# Altium PCB PCB3.PcbDoc
Units mil, origin at the board's own origin, x right, y up, seen from the top; angles counter-clockwise.
Board outline 1122.39 x 925 mil, 4 copper layers (Top Layer, GND02, PWR03, Bottom Layer), stack 50.526 mil thick; 40 components, 55 nets, 222 pads, 139 vias.
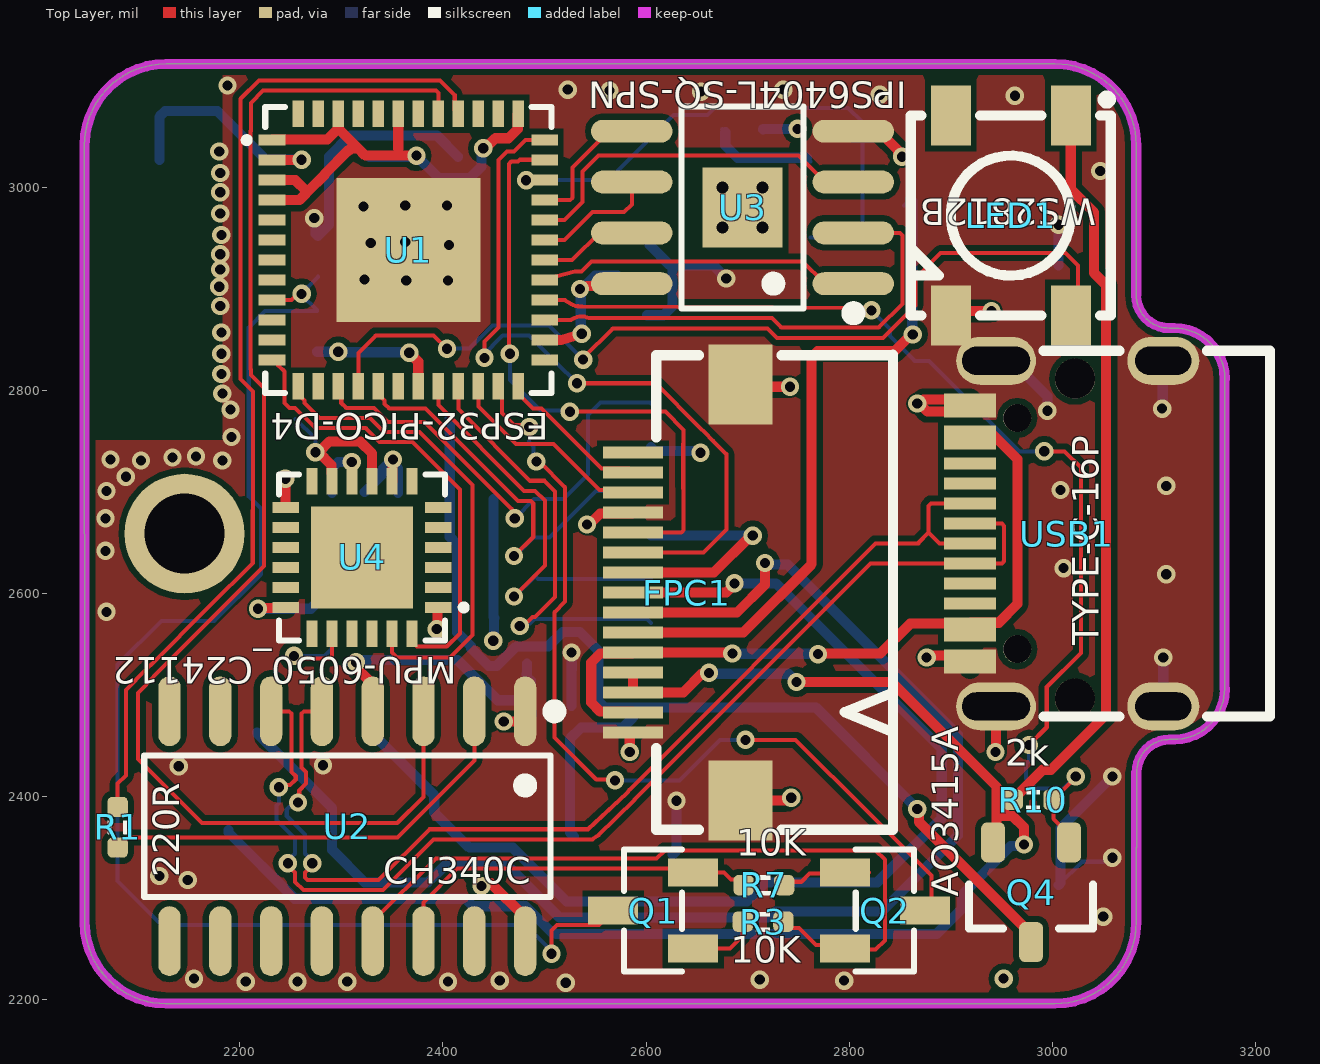
[diagram p0: Top Layer view]
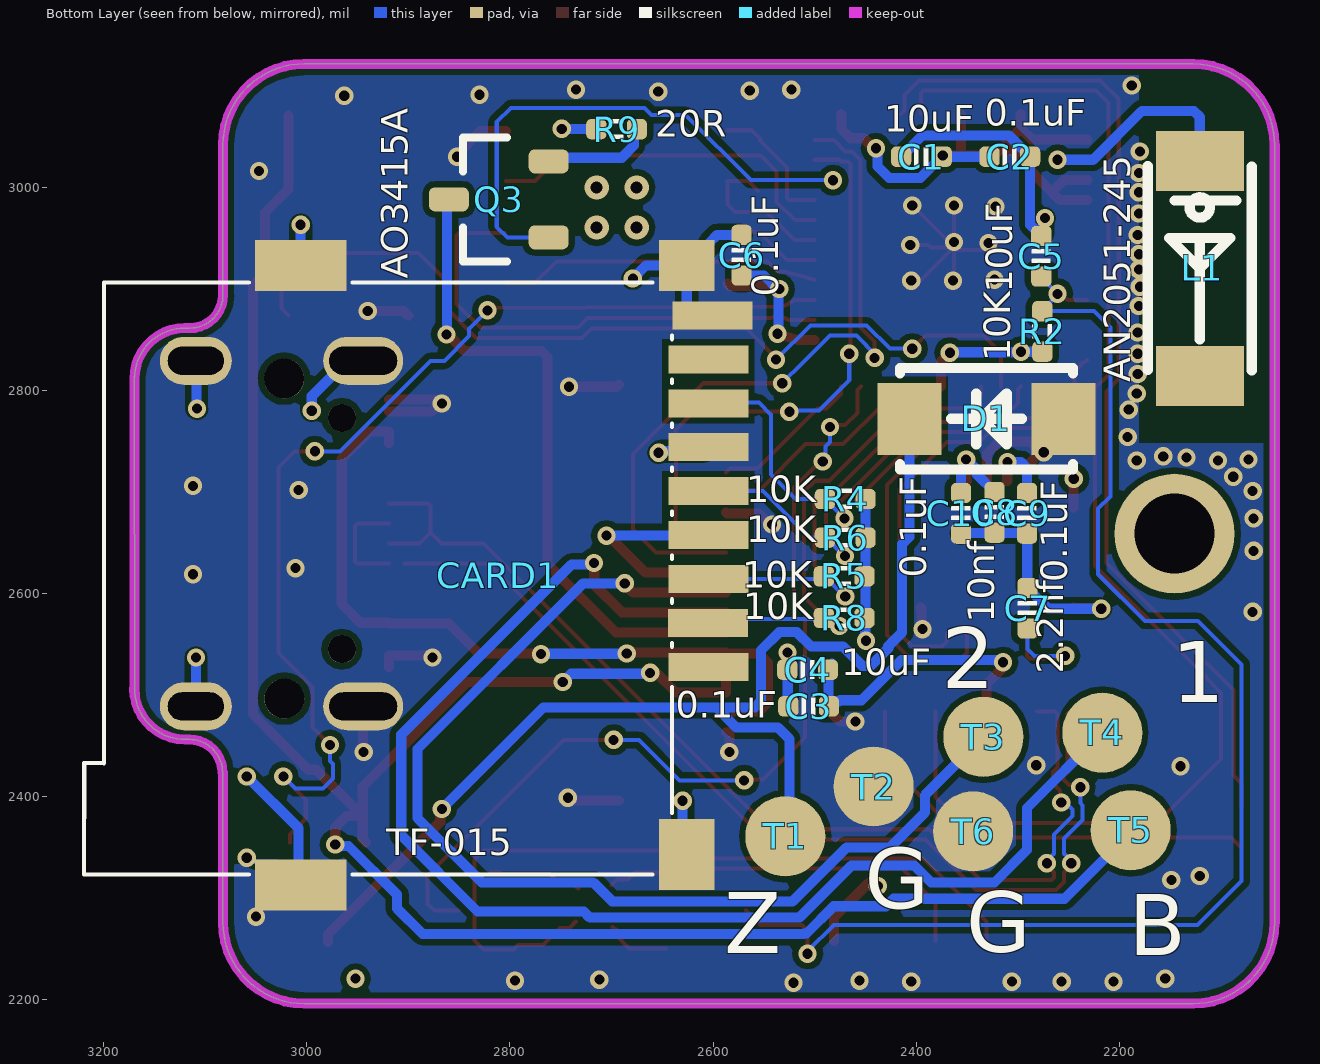
[diagram p1: Bottom Layer view, seen from below]
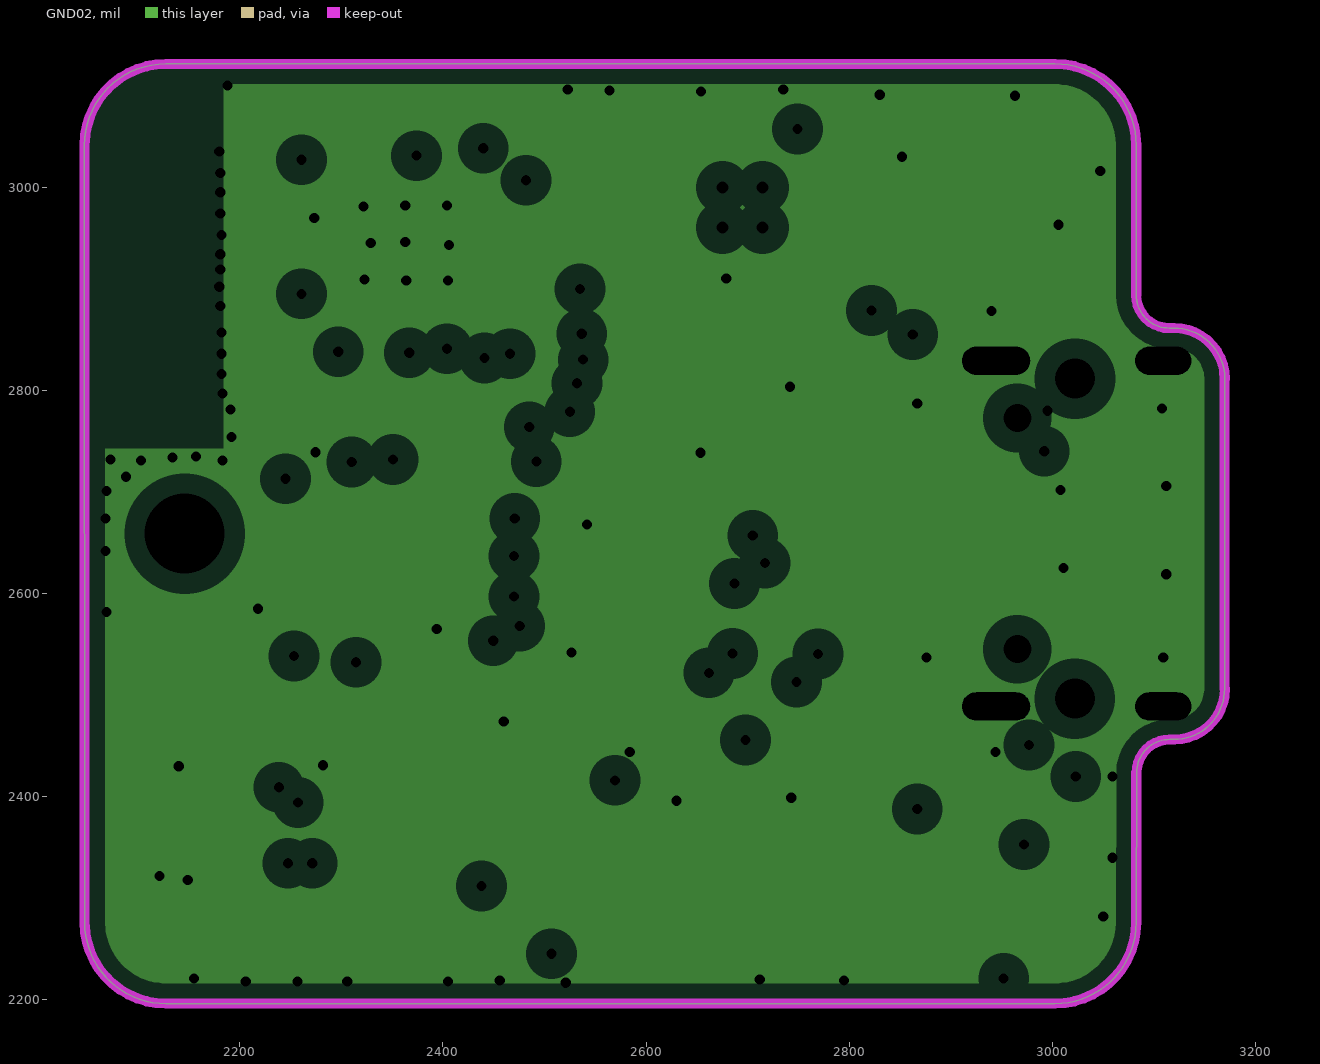
[diagram p2: GND02, clearances drawn from the general rule]
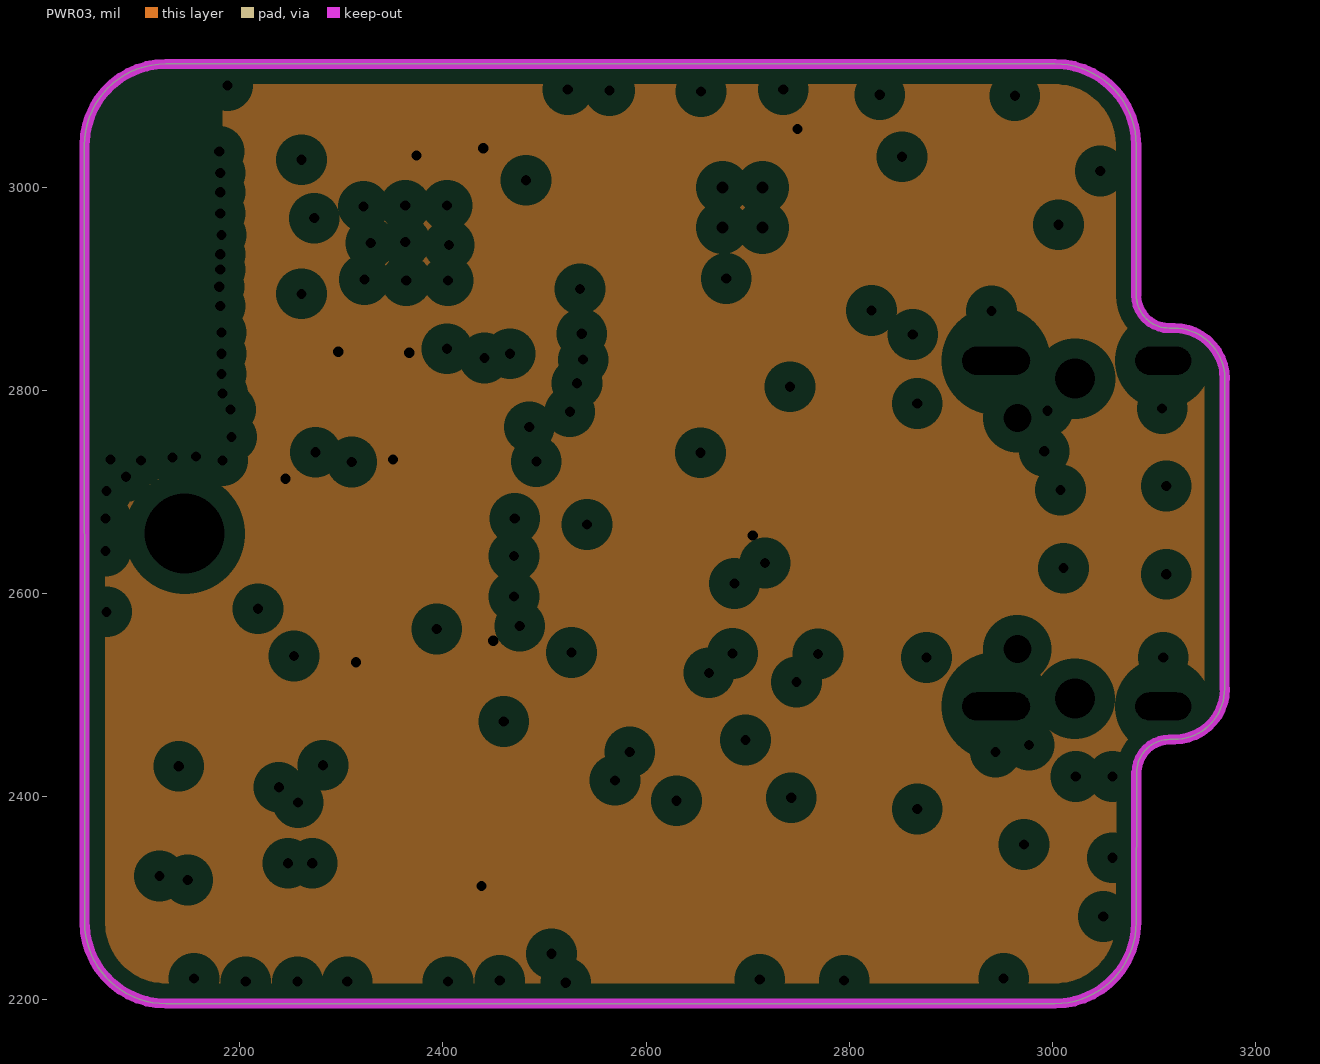
[diagram p3: PWR03, clearances drawn from the general rule]
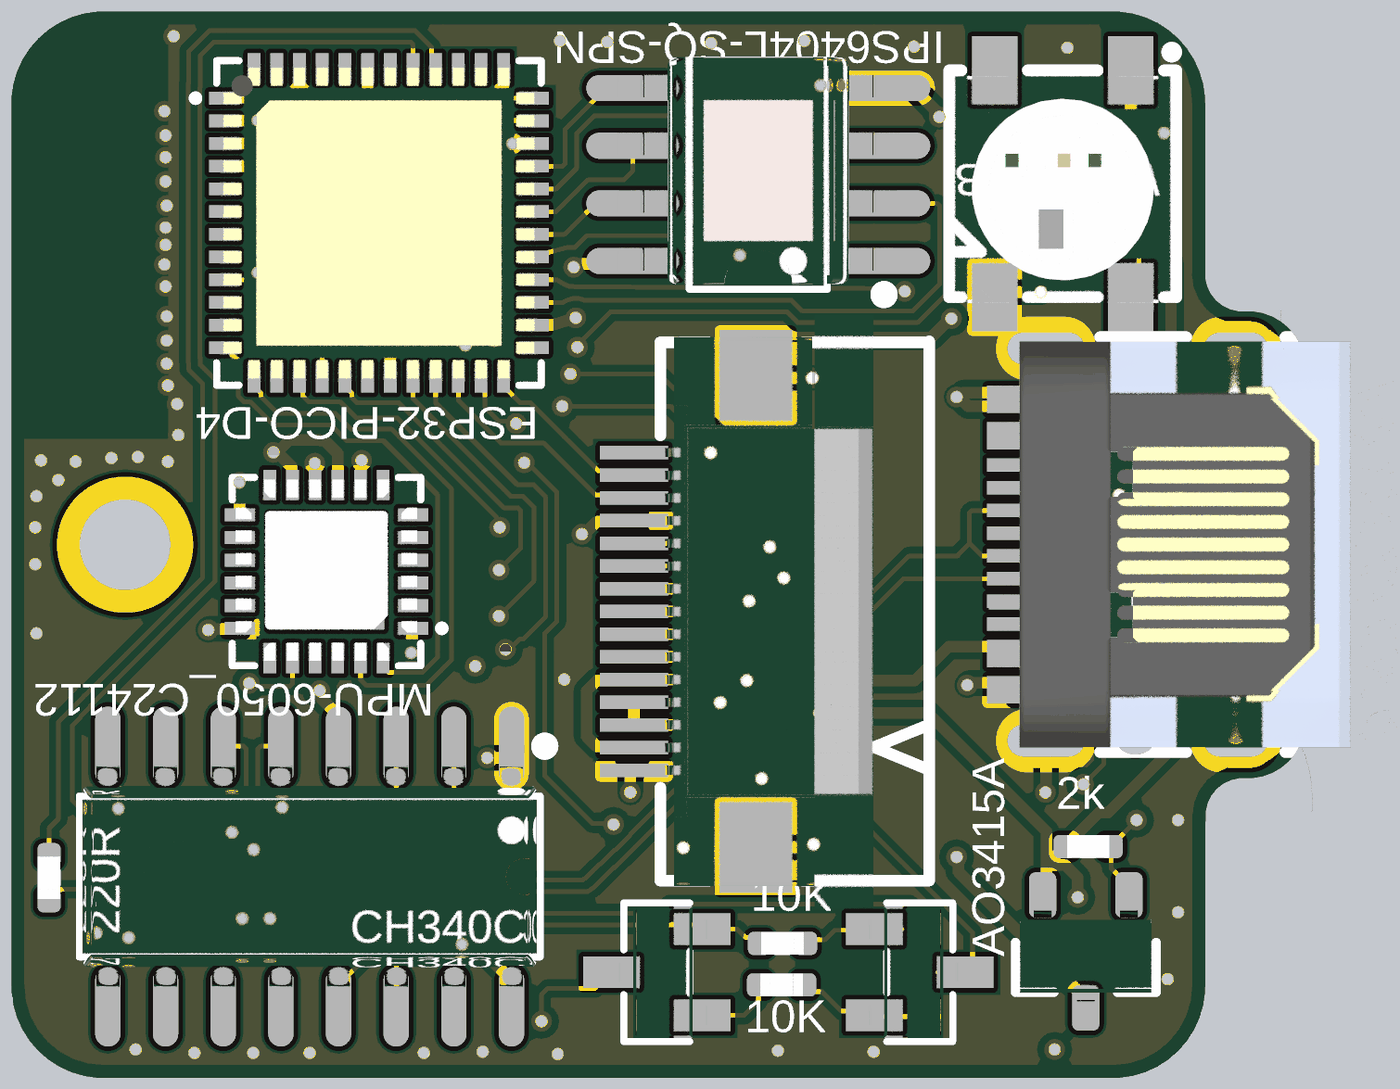
[diagram p4: 3D render of the assembled board from above, using the file's embedded part models]
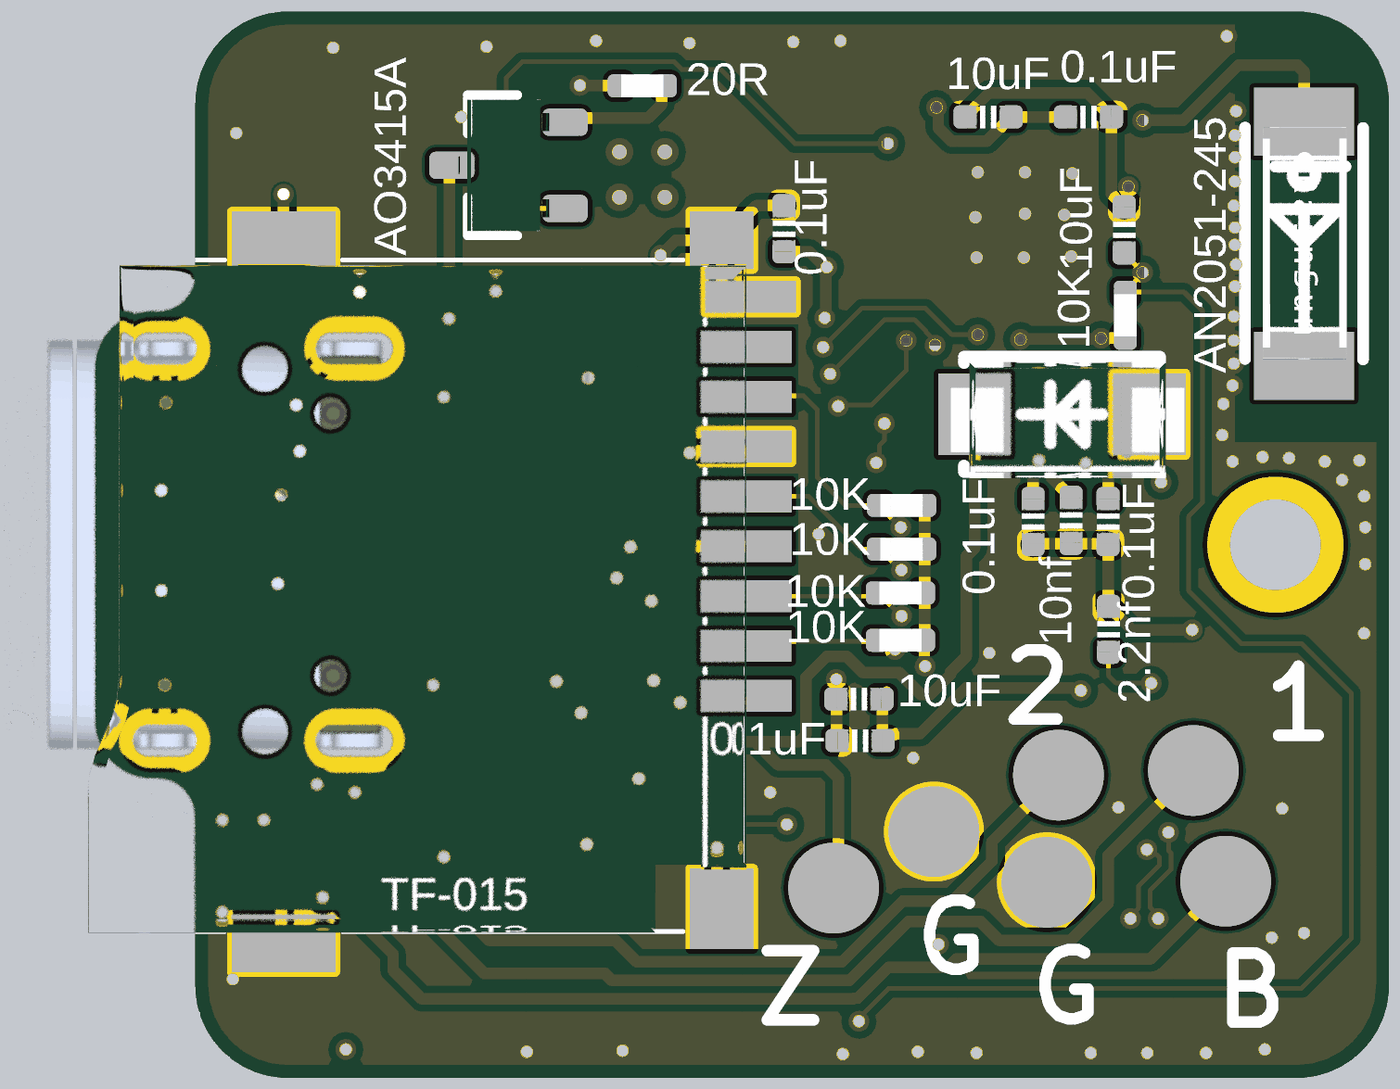
[diagram p5: 3D render of the assembled board from below, using the file's embedded part models]

## Layer stack, top to bottom
Top Solder: solder mask 0.4, Solder Resist, Dk 3.5
Top Layer: signal copper 1.4
Dielectric 2: prepreg 2.8, PP-006, Dk 4.1
GND02: plane copper 1.378, net CS
Dielectric 1: dielectric 39.3701, FR-4, Dk 4.8
PWR03: plane copper 1.378, net VCC3_3V
Dielectric 3: prepreg 2.8, PP-006, Dk 4.1
Bottom Layer: signal copper 1.4
Bottom Solder: solder mask 0.4, Solder Resist, Dk 3.5

## Board outline
2127.45,2196.37 cw(c2127.45,2276.37) 2047.45,2276.37 2047.28,3041.37 cw(c2127.37,3041.28) 2127.45,3121.37 3002.45,3121.37 cw(c3002.45,3041.37) 3082.45,3041.37 3082.45,2893.87 ccw(c3115,2893.82) 3114.95,2861.27 3119.5,2861.37 cw(c3119.56,2811.27) 3169.66,2811.33 3169.45,2506.28 cw(c3119.72,2506.1) 3119.89,2456.37 3115.45,2456.37 ccw(c3115.45,2423.77) 3082.86,2423.77 3082.45,2276.37 cw(c3002.45,2276.37) 3002.45,2196.37

## Design rules (kind name [scope] priority, off if disabled: settings)
Clearance [All] p1: gap=6 ignorepadtopadclearanceinfootprint=FALSE
ComponentClearance [All] p1: gap=10 collisioncheckmode=3 verticalgap=0 showdistances=FALSE
DiffPairsRouting [All] p1: maxlimit=10 minlimit=6 mostfreqgap=6 toplayer_minwidth=4 toplayer_maxwidth=15 toplayer_prefwidth=4 bottomlayer_minwidth=4 bottomlayer_maxwidth=15 bottomlayer_prefwidth=4 maxuncoupledlength=500
HoleToHoleClearance [All] p1: gap=0 allowstackedmicrovias=TRUE
MinimumSolderMaskSliver [All] p1: minsoldermaskwidth=0
PlaneClearance [All] p1: clearance=20
PlaneConnect [All] p1: planeconnectstyle=Direct reliefexpansion=20 reliefentries=4 reliefconductorwidth=10 reliefairgap=10
PolygonConnect [All] p1: connectstyle=Direct reliefconductorwidth=10 reliefentries=4 polygonreliefangle="90 Angle" airgapwidth=10
RoutingVias [All] p1: holewidth=10 width=18 viastyle="Through Hole" minholewidth=10 minwidth=18 maxholewidth=28 maxwidth=50
SilkToSilkClearance [All] p1: silktosilkclearance=0
SilkToSolderMaskClearance [IsPad] p1: minsilkscreentomaskgap=0 clearancetoexposedcopper=TRUE
SolderMaskExpansion [All] p1: expansion=4 istentingtop=FALSE
Width [All] p1: maxlimit=10 minlimit=4 preferedwidth=4
22 further rules are at their usual default settings.

## Classes and differential pairs
component class Main: C1 C2 C3 C4 C5 C6 C7 C8 C9 C10 CARD1 D1 FPC1 L1 LED1 Q1 Q2 Q3 Q4 R1 R2 R3 R4 R5 R6 R7 R8 R9 R10 T4 T5 T6 U1 U2 U3 U4 USB1
differential pair USB2C: +USB2C_P -USB2C_N

## Components (designator, comment, footprint, x,y, rotation, side; value= is the part's Value field where it differs from the comment)
C1 "10uF" CAP_0402 2395,3030 r0 bottom locked value=0.1u
C2 "0.1uF" CAP_0402 2308,3030 r180 bottom locked value=0.1u
C3 "0.1uF" CAP_0402 2506,2489 r0 bottom locked value=0.1u
C4 "10uF" CAP_0402 2507,2525 r0 bottom locked value=0.1u
C5 "10uF" CAP_0402 2277,2932 r270 bottom locked value=0.1u
C6 "0.1uF" CAP_0402 2572,2933 r90 bottom locked value=0.1u
C7 "2.2nf" CAP_0402 2290.54,2585.54 r90 bottom locked value=0.1u
C8 "10nf" CAP_0402 2323,2680 r270 bottom locked value=0.1u
C9 "0.1uF" CAP_0402 2291,2679 r270 bottom locked value=0.1u
C10 "0.1uF" CAP_0402 2356,2679 r270 bottom locked value=0.1u
CARD1 "TF-015" TF-SMD_TF-015 2803.43,2618 r270 bottom locked
D1 "SS32_C727059" SMAF_L4.3-W2.5-LS5.0-RD 2331,2772 r180 bottom locked
FPC1 "AFC01-S15FCC-00" FPC-SMD_AFC01-S15FCC-00 2640,2601 r90 top locked
L1 "AN2051-245" ANT2051 2121,2920 r270 bottom locked
LED1 "WS2812B" LED-SMD_4P-L5.0-W5.0-TL 2959,2972 r270 top locked
Q1 "S8050_C908252" SOT-23-3_L2.9-W1.3-P1.90-LS2.4-BR 2607,2288 r0 top locked
Q2 "S8050_C908252" SOT-23-3_L2.9-W1.3-P1.90-LS2.4-BR 2835,2288 r180 top locked
Q3 "AO3415A" SOT23-3 2811,2988 r0 bottom locked
Q4 "AO3415A" SOT23-3 2979,2306 r270 top locked
R1 "220R" RES_0402 2080,2370 r90 top locked value=22R
R2 "10K" RES_0402 2276,2858 r270 bottom locked value=22R
R3 "10K" RES_0402 2715.22,2277 r180 top locked value=22R
R4 "10K" RES_0402 2470,2693 r180 bottom locked value=22R
R5 "10K" RES_0402 2471,2617 r180 bottom locked value=22R
R6 "10K" RES_0402 2470,2655 r180 bottom locked value=22R
R7 "10K" RES_0402 2716,2313 r0 top locked value=22R
R8 "10K" RES_0402 2471,2576 r180 bottom locked value=22R
R9 "20R" RES_0402 2695,3057 r0 bottom locked value=22R
R10 "2k" RES_0402 2981,2397 r180 top locked value=22R
T1 "Z" TEST_PT 2529,2360.99 r180 bottom
T2 "G" TEST_PT 2442,2409.99 r180 bottom
T3 "2" TEST_PT 2334,2458.99 r180 bottom
T4 "1" TEST_PT 2217,2463 r180 bottom
T5 "B" TEST_PT 2189,2367 r180 bottom
T6 "G" TEST_PT 2344,2365.99 r180 bottom
U1 "ESP32-PICO-D4" QFN-48_L7.0-W7.0-P0.50-BL-EP5.1 2366,2938 r270 top locked
U2 "CH340C" SOP-16_L10.0-W3.9-P1.27-LS6.0-BL 2306,2371 r180 top locked
U3 "IPS6404L-SQ-SPN" SOIC-8_L5.0-W4.0-P1.27-LS6.0-BL-EP 2695,2980 r90 top locked
U4 "MPU-6050_C24112" QFN-24_L4.0-W4.0-P0.50-BL-EP2.6 2320.54,2635.54 r90 top locked
USB1 "TYPE-C-16P" USB-C-SMD_KH-TYPE-C-16P 3014,2659 r90 top locked

## Footprints (in the part's own frame and the unit in brackets; to place one, negate y for a bottom-side part, rotate by r counter-clockwise, add the part's x,y. Pads: shape width x height; smd on the part's side, far side on the other; paste and mask are expansions set on the pad)
ANT2051 [mm]
  rect 1.5x2.2 smd: 1(-2.69,0) 2(2.69,0)
  rrect50% 0.8x1.8 smd: 1(-2.667,0.127) ""(2.436,0.127)
  silkscreen extent -2.56,-1.3 2.55,1.3, body extent -2.57,-0.91 2.54,0.94, height 1.32
CAP_0402 [mil]
  rrect50% 20x20 smd: 1(-20,0) 2(20,0)
  silkscreen extent -6,-9 6,9, body extent -20,-10 20,10, height 20
FPC-SMD_AFC01-S15FCC-00 [mm]
  rect 0.3x1.5 smd: 1(-3.5,1.34) 2(-3,1.34) 3(-2.5,1.34) 4(-2,1.34) 5(-1.5,1.34) 6(-1,1.34) 7(-0.5,1.34) 8(0,1.34) 9(0.5,1.34) 10(1,1.34) 11(1.5,1.34) 12(2,1.34) 13(2.5,1.34) 14(3,1.34) 15(3.5,1.34)
  rect 2x1.6 smd: 16(-5.2,-1.341) 17(5.2,-1.341)
  silkscreen extent -5.93,-5.16 5.95,0.76, body extent -6.55,-3.94 6.55,1.36, height 2
LED-SMD_4P-L5.0-W5.0-TL [mm]
  rect 1.5x1 smd: 1(-2.5,1.5) 2(-2.5,-1.5) 3(2.5,-1.5) 4(2.5,1.5)
  silkscreen extent -3,-2.5 2.5,2.5, body extent -2.57,-2.5 2.83,2.5, height 1.5
QFN-24_L4.0-W4.0-P0.50-BL-EP2.6 [mm]
  rect 0.28x0.665 smd: 1(-1.25,-1.907) 2(-0.75,-1.907) 3(-0.25,-1.907) 4(0.25,-1.907) 5(0.75,-1.907) 6(1.25,-1.907) 13(1.25,1.907) 14(0.75,1.907) 15(0.25,1.907) 16(-0.25,1.907) 17(-0.75,1.907) 18(-1.25,1.907)
  rect 0.665x0.28 smd: 7(1.907,-1.25) 8(1.907,-0.75) 9(1.907,-0.25) 10(1.907,0.25) 11(1.907,0.75) 12(1.907,1.25) 19(-1.907,1.25) 20(-1.907,0.75) 21(-1.907,0.25) 22(-1.907,-0.25) 23(-1.907,-0.75) 24(-1.907,-1.25)
  rect 2.55x2.55 smd: 25(0,0)
  silkscreen extent -2.08,-2.61 2.08,2.08, body extent -1.97,-2 2.03,2, height 0.93
QFN-48_L7.0-W7.0-P0.50-BL-EP5.1 [mm]
  rect 0.28x0.665 smd: 1(-2.75,-3.408) 2(-2.25,-3.408) 3(-1.75,-3.408) 4(-1.25,-3.408) 5(-0.75,-3.408) 6(-0.25,-3.408) 7(0.25,-3.408) 8(0.75,-3.408) 9(1.25,-3.408) 10(1.75,-3.408) 11(2.25,-3.408) 12(2.75,-3.408) 25(2.75,3.408) 26(2.25,3.408) 27(1.75,3.408) 28(1.25,3.408) 29(0.75,3.408) 30(0.25,3.408) 31(-0.25,3.408) 32(-0.75,3.408) 33(-1.25,3.408) 34(-1.75,3.408) 35(-2.25,3.408) 36(-2.75,3.408)
  rect 0.665x0.28 smd: 13(3.408,-2.75) 14(3.408,-2.25) 15(3.408,-1.75) 16(3.408,-1.25) 17(3.408,-0.75) 18(3.408,-0.25) 19(3.408,0.25) 20(3.408,0.75) 21(3.408,1.25) 22(3.408,1.75) 23(3.408,2.25) 24(3.408,2.75) 37(-3.408,2.75) 38(-3.408,2.25) 39(-3.408,1.75) 40(-3.408,1.25) 41(-3.408,0.75) 42(-3.408,0.25) 43(-3.408,-0.25) 44(-3.408,-0.75) 45(-3.408,-1.25) 46(-3.408,-1.75) 47(-3.408,-2.25) 48(-3.408,-2.75)
  rect 3.6x3.6 smd: 49(0,0)
  silkscreen extent -3.58,-4.11 3.58,3.58, body extent -3.5,-3.5 3.5,3.5, height 1.04
RES_0402 [mil]
  rrect50% 20x20 smd: 1(-20,0) 2(20,0)
  silkscreen extent -7,-10 7,10, body extent -20,-10 20,10, height 14
SMAF_L4.3-W2.5-LS5.0-RD [mm]
  rect 1.6x1.8 smd: 1(-1.926,0) 2(1.926,0)
  silkscreen extent -2.16,-1.27 2.16,1.27, body extent -2.44,-1.41 2.7,1.15, height 2.5
SOIC-8_L5.0-W4.0-P1.27-LS6.0-BL-EP [mm]
  oval 0.574x2.038 smd: 1(-1.905,-2.769) 2(-0.635,-2.769) 3(0.635,-2.769) 4(1.905,-2.769) 5(1.905,2.769) 6(0.635,2.769) 7(-0.635,2.769) 8(-1.905,2.769)
  rect 2x2 smd: 9(0,0)
  silkscreen extent -2.79,-2.92 2.53,1.52, body extent -2.41,-3.1 2.59,3.1, height 1.74
SOP-16_L10.0-W3.9-P1.27-LS6.0-BL [mm]
  oval 0.56x1.745 smd: 1(-4.445,-2.873) 2(-3.175,-2.873) 3(-1.905,-2.873) 4(-0.635,-2.873) 5(0.635,-2.873) 6(1.905,-2.873) 7(3.175,-2.873) 8(4.445,-2.873) 9(4.445,2.873) 10(3.175,2.873) 11(1.905,2.873) 12(0.635,2.873) 13(-0.635,2.873) 14(-1.905,2.873) 15(-3.175,2.873) 16(-4.445,2.873)
  silkscreen extent -5.33,-3.02 5.08,1.77, body extent -4.99,-3.12 4.99,3.12, height 1.59
SOT23-3 [mm] "SOT23, 3-Leads, Body 3.1x3.0mm (max), Pitch 0.95mm, IPC Medium Density"
  rrect50% 1x0.6 smd: 1(-1.246,0.95) 2(-1.246,-0.95) 3(1.246,0)
  silkscreen extent -0.2,-1.55 0.9,1.55, body extent -1.3,-1.45 1.5,1.45, height 1.2
SOT-23-3_L2.9-W1.3-P1.90-LS2.4-BR [mm]
  rect 1.25x0.7 smd: 1(1,-0.95) 2(1,0.95) 3(-1,0)
  silkscreen extent -0.73,-1.53 0.73,1.53, body extent -1.02,-1.45 1.28,1.45, height 1
TEST_PT [mm]
  rrect100% 2x2 smd: 0(0,0)
TF-SMD_TF-015 [mm]
  rect 0.7x2 smd: 1(2.292,5.045) 2(1.192,5.043) 3(0.096,5.045) 4(-1.004,5.045) 5(-2.103,5.045) 6(-3.201,5.045) 7(-4.297,5.045) 8(-5.395,5.045) 9(-6.499,5.145)
  rect 1.27x1.397 smd: 10(-7.747,4.507)
  rect 1.27x2.286 smd: 11(-7.747,-5.145) 12(7.747,-5.145)
  rect 1.778x1.397 smd: 13(6.985,4.507)
  round 1 hole 1 unplated: ""(-4.915,-5.557) ""(3.084,-5.554)
  silkscreen extent -7.31,-10.56 7.49,4.14, body extent -7.89,-11.65 8.21,5.55, height 2.2
USB-C-SMD_KH-TYPE-C-16P [mm]
  oval 1.2x2 hole 0.7 slot 1.7 at 90 deg: 1(-4.32,1.765) 2(4.32,1.765)
  oval 1.2x1.8 hole 0.7 slot 1.4 at 90 deg: 3(-4.32,-2.415) 4(4.32,-2.415)
  rect 0.3x1.3 smd: A1(-3.35,2.415) A4(-2.55,2.415) A5(-1.25,2.415) A6(-0.25,2.415) A7(0.25,2.415) A8(1.25,2.415) A9(2.55,2.415) A12(3.35,2.415) B1(3.05,2.415) B4(2.25,2.415) B5(1.75,2.415) B6(0.75,2.415) B7(-0.75,2.415) B8(-1.75,2.415) B9(-2.25,2.415) B12(-3.05,2.415)
  round 0.7 hole 0.7 unplated: ""(-2.89,1.235) ""(2.89,1.235)
  silkscreen extent -4.57,-5.08 4.57,0.57, body extent -4.47,-4.95 4.47,2.95, height 3.2

## Part data
C1 C2 C3 C4 C5 C6 C7 C8 C9 C10: library part 电容-0402, "Capacitor"
CARD1: library part TF卡座-015, BOM_JLCPCB Part Class="Extended Part", BOM_Manufacturer=SOFNG, BOM_Manufacturer Part=TF-015, BOM_Supplier=LCSC, BOM_Supplier Part=C113206, spicePre=C, spiceSymbolName=TF-015
D1: BOM_JLCPCB Part Class="Extended Part", BOM_Manufacturer=TWGMC, BOM_Manufacturer Part=SS32, BOM_Supplier=LCSC, BOM_Supplier Part=C727059, Contributor=LCSC, spicePre=D, spiceSymbolName=SS32_C727059
FPC1: library part FPC-15P-0.5-AFC01-S15FCC-00, BOM_JLCPCB Part Class="Extended Part", BOM_Manufacturer=JUSHUO, BOM_Manufacturer Part=AFC01-S15FCC-00, BOM_Supplier=LCSC, BOM_Supplier Part=C262271, Contributor=LCSC, spicePre=F, spiceSymbolName=AFC01-S15FCC-00
L1: library part WIFI天线-AN2051-245, BOM_JLCPCB Part Class="Extended Part", BOM_Manufacturer=Rainsun, BOM_Manufacturer Part=AN2051-245, BOM_Supplier=LCSC, BOM_Supplier Part=C99727, spicePre=L, spiceSymbolName=AN2051-245
LED1: "RGB灯单线控制", BOM_JLCPCB Part Class="Extended Part", BOM_Manufacturer=Worldsemi, BOM_Manufacturer Part=WS2812B, BOM_Supplier=LCSC, BOM_Supplier Part=C114585, Contributor=LCSC, spicePre=L, spiceSymbolName=WS2812B
Q1 Q2: library part 三极管-贴片-S8050_C908252, BOM_JLCPCB Part Class="Extended Part", BOM_Manufacturer=FUXINSEMI, BOM_Manufacturer Part=S8050, BOM_Supplier=LCSC, BOM_Supplier Part=C908252, Contributor=LCSC, spicePre=Q, spiceSymbolName=S8050_C908252
Q3 Q4: library part MOS管-P-AO3415A, "MOSFET", LatestRevisionDate=17-Jul-2002, LatestRevisionNote="Re-released for DXP Platform.", PackageDescription="TO, Flat Index; 3 In-Line, Axial Leads; Body Dia. 4.6mm; Lead Dia. 0.5 mm (max)", PackageReference=E3, PackageVersion=1995/1996, Published=8-Jun-2000, Publisher="Altium Limited"
R1 R2 R3 R4 R5 R6 R7 R8 R9 R10: library part 电阻-0402, "Resistor"
T1 T2 T3 T4 T5 T6: library part 测试点
U1: BOM_JLCPCB Part Class="Extended Part", BOM_Manufacturer="Espressif Systems", BOM_Manufacturer Part=ESP32-PICO-D4, BOM_Supplier=LCSC, BOM_Supplier Part=C193707, Contributor=LCSC, spicePre=U, spiceSymbolName=ESP32-PICO-D4
U2: BOM_JLCPCB Part Class="Extended Part", BOM_Manufacturer=WCH, BOM_Manufacturer Part=CH340C, BOM_Paste Type="Extended Part", BOM_Supplier=LCSC, BOM_Supplier Part=C84681, spicePre=U, spiceSymbolName=CH340C
U3: "psram 8m"
U4: BOM_JLCPCB Part Class="Basic Part", BOM_Manufacturer=InvenSense, BOM_Manufacturer Part=MPU-6050, BOM_Supplier=LCSC, BOM_Supplier Part=C24112, sourceId=1T5FDZYC8, spicePre=U, spiceSymbolName=MPU-6050_C24112, timeStamp=1462265206
USB1: library part USBC母座-16P, BOM_JLCPCB Part Class="Extended Part", BOM_Manufacturer="Shenzhen Kinghelm Elec", BOM_Manufacturer Part=KH-TYPE-C-16P, BOM_Paste Type="Extended Part", BOM_Supplier=LCSC, BOM_Supplier Part=C709357, Contributor=LCSC, spicePre=U, spiceSymbolName=KH-TYPE-C-16P

## Free pads (board coordinates)
  round 118.11 hole 78.74: ""(2145.87,2658.87)

## Via types
v1: diameter 18, hole 10, Top Layer to Bottom Layer, tented both sides, 135 vias
v2: diameter 24, hole 12, Top Layer to Bottom Layer, tented both sides, 4 vias

## Nets (pads, with @x,y where several pads share a name; then routed paths per layer and width w, separated by ;. In a path a pad name is that pad's centre, name@x,y a point inside that pad or via, vN(x,y) a via of type N, cw(c..) or ccw(c..) an arc to the next point about the centre after c; other vN are vias at no path point)
BH_SCL: U1.13 U4.23 | length 474
  Top Layer w4: U1.13 2257.73,2796.27 2263.91,2790.09 2263.91,2787.44 2278.59,2772.76 2328.24,2772.76 2342,2759 2377,2759 2429,2707 2429,2559 2407,2537 2355,2537 2350.06,2541.94 U4.23
BH_SDA: U1.12 U4.24 | length 459.6
  Top Layer w4: U1.12 2237.79,2826.22 2237.79,2824.56 2239.04,2823.32 2242.97,2819.81 2244.22,2818.55 2244.22,2787.44 2248.91,2782.76 2254.45,2782.76 2274.45,2762.76 2324.1,2762.76 2337.86,2749 2370,2749 2416.72,2702.28 2416.72,2560.87 2403.86,2548 2386.96,2548 2374.61,2548 2369.75,2552.86 U4.24
CHAR_5V: FPC1.2 FPC1.5 USB1.A4 USB1.A9 USB1.B4 USB1.B9 | length 741.6
  Top Layer w10: FPC1.2 2586.32,2483.8 2555.02,2483.8 2546.05,2492.77 2546.05,2532.08 2555.02,2541.05 2586.32,2541.05 FPC1.5 2684.05,2541.95 v1(2685,2541) ; v1(2769.36,2540.36) 2770,2541 2830.58,2541 2860,2570.42 USB1.B9 2919.82,2571.33 2947.19,2571.33 2965.51,2589.64 2965.51,2732.5 2938.61,2759.4 USB1.A9 USB1.B4
  Bottom Layer w10: v1(2685,2541) 2685.32,2540.68 2769.04,2540.68 v1(2769.36,2540.36)
CIOL1: FPC1.8 T3.0 | length 1111.6
  Top Layer w10: FPC1.8 2679.01,2601.01 2687,2609 v1(2687,2610)
  Bottom Layer w10: T3.0 2391.63,2401.37 2391.63,2384.37 2426.12,2349.88 2468.88,2349.88 2521.77,2297 2699.46,2297 2718.14,2315.69 2827.69,2315.69 2891,2379 2891,2447 2728,2610 v1(2687,2610)
COIL2: FPC1.7 T4.0 | length 1358.1
  Top Layer w10: FPC1.7 2689.59,2581.31 2717,2608.72 2717,2621 2717.19,2621.19 v1(2717.19,2630)
  Bottom Layer w10: T4.0 2291,2389.01 2291,2347.77 2323.14,2315.63 2385.27,2315.63 2401.82,2332.18 2463.96,2332.18 2515.14,2281 2721.31,2281 2727.31,2287 2832,2287 2907,2362 2907,2461 2739.53,2628.47 2718.72,2628.47 v1(2717.19,2630)
CS: C1.2 C2.2 C3.2 C4.2 C5.1 C6.2 C7.2 C8.2 C9.2 C10.2 CARD1.6 CARD1.9 CARD1.10 CARD1.11 CARD1.12 CARD1.13 D1.2 FPC1.1 FPC1.12 FPC1.16 FPC1.17 LED1.3 T2.0 T6.0 U1.49 U2.1 U3.4 U4.1 U4.9 U4.11 U4.18 USB1.1 USB1.2 USB1.3 USB1.4 USB1.A1 USB1.A12 USB1.B1 USB1.B12 | length 2206.3
  Top Layer w4: v1(2329,2945) 2336,2938 U1.49@2363,2938 ; v1(2363,2982) v1(2363,2946) ; v1(2364,2908) 2364,2912 2363,2913 U1.49@2363,2938 ; v1(2404,2982) 2368,2946 v1(2363,2946) ; v1(2405,2908) 2396,2908 U1.49 ; v1(2406,2943) 2388.5,2943 2386,2940.5 U1.49@2368.5,2940.5 ; U1.49@2363,2938 U1.49 ; U1.49@2363,2938 v1(2363,2946) ; v1(2363,2946) U1.49@2368.5,2940.5 ; U1.49 U1.49@2368.5,2940.5
  Top Layer w10: v1(2218,2585) 2218.81,2585.81 2244.93,2585.81 U4.18 ; v1(2274.54,2739) v1@2277.72,2739 ; U4.11 2291.01,2718.21 2290.5,2718.72 2290.5,2726.22 v1@2277.72,2739 ; U4.9 2330.38,2737.77 2318.65,2749.5 2314.43,2749.5 2314.17,2749.76 2288.47,2749.76 v1@2277.72,2739 ; v1(2394,2565) 2394.82,2565.82 2394.82,2585.81 2395.33,2586.32 U4.1 ; v1(2460,2474) 2475.44,2474 2481,2479.56 U2.1 ; v1(2542,2668) 2544.18,2668 2555.02,2678.84 2586.32,2678.84 FPC1.12 ; v1(2584,2444) 2584,2462.31 2584.91,2463.21 FPC1.1 ; FPC1.16 2738.11,2396.28 2740.84,2399 v1(2743,2399) ; FPC1.17 2694.93,2803.55 v1(2741.78,2803.55) ; U3.4 2829.43,3055 2848,3036.43 2848,3034 v1(2852,3030) ; v1(2867,2787) v1@2869.16,2787 ; v1(2876.19,2537.09) 2878.02,2538.92 USB1.B12 USB1.A1 ; LED1.3 2904.38,2878 v1(2940,2878) ; USB1.B1 2877.08,2779.08 v1@2869.16,2787 ; USB1.A12 2873.05,2790.89 v1@2869.16,2787 ; v1(2944,2444) 2944.51,2444.51 USB1.1
  Bottom Layer w4: D1.2 2274.54,2752.64 v1(2274.54,2739) ; CARD1.12 3029,2336 3051.21,2336 3055.21,2340 v1(3059,2340)
  Bottom Layer w10: v1(2218,2585) 2270,2585 C7.2 2290.77,2605.77 2290.77,2658.77 C9.2 2291.5,2659.5 2322.5,2659.5 C8.2 2323.5,2659.5 2355.5,2659.5 C10.2 ; v1(2273.45,2969.47) 2274.98,2967.94 2274.98,2954.02 C5.1 2288,2963 C2.2 2309,3051 2394,3051 C1.2 ; C3.2@2526.5,2489.5 C4.2@2526.5,2524.5 ; v1(2526.72,2542) 2526.86,2541.86 2526.86,2525.14 C4.2 ; C6.2 2596,2953 2603.5,2945.5 2603.5,2943 2623.5,2923 CARD1.10 ; CARD1.9 2617.22,2873.88 2626,2882.66 CARD1.10 ; CARD1.6 2608.66,2740.16 2652.1,2740.16 v1(2653.63,2738.63) ; CARD1.13 2630,2347 v1(2630,2396) ; v1(2679,2910) 2666,2923 CARD1.10 ; USB1.2 2960.26,2829.08 2995,2794.34 v1(2995,2780) ; CARD1.12 3008,2315 3008,2369 v1(3059,2420) ; CARD1.11 v1(3006,2963) ; v1(3108,2782) 3108.54,2782.54 3108.54,2828.54 USB1.4 ; v1(3109,2537) 3109.08,2536.92 USB1.3
  other v1: 2521,2217 2206,2218 2257,2218 2306,2218 2405,2218 2456,2219 2795,2219 2712,2220 2155,2221 3050,2282 2149,2318 2121,2322 2140,2430 2282,2431 2069,2582 3112,2619 3011,2625 2068,2642 2068,2674 2069,2701 3008,2702 3112,2706 2088,2715 2103,2731 2183,2731 2073,2732 2134,2734 2157,2735 2192,2754 2191,2781 2183,2797 2182,2816 2182,2836 2182,2857 2181,2883 2180,2902 2323,2909 2181,2919 2181,2934 2182,2953 2181,2974 2322,2981 2181,2995 2181,3014 3047,3016 2180,3035 2963,3090 2830,3091 2654,3094 2564,3095 2523,3096 2735,3096 2188,3100
D/C: FPC1.13 U1.22 | length 207.1
  Top Layer w4: U1.22 2434.9,2784.1 2472,2747 2509,2747 2554.04,2701.96 2584.7,2701.96 FPC1.13
DTR: Q2.2 R3.1 U2.13 | length 749.8
  Top Layer w4: U2.13 2331,2277 2393.18,2339.18 2610.45,2339.18 2618.45,2347.18 2825.83,2347.18 2835,2338.01 2835,2258.64 2825.96,2249.6 Q2.2@2795.63,2249.6 ; R3.1 2741.22,2271 2750.62,2271 2767.37,2254.25 2791.98,2254.25 Q2.2
EN: C5.2 Q1.3 R2.1 U1.9 | length 1340.9
  Top Layer w4: U1.9 2251,2888.79 2257.21,2895 v1(2261,2895) ; v1(2507.02,2245.48) 2507.02,2268.4 2512.49,2273.87 2553.5,2273.87 Q1.3
  Bottom Layer w4: C5.2 2277,2911.5 2261,2895.5 v1(2261,2895) 2261,2894 2276,2879 R2.1 2225,2878 2209,2862 2209,2695.5 2221,2683.5 2221,2619 2175,2573 2123,2573 2080,2530 2080,2317 2123.13,2273.87 2481.26,2273.87 2507.02,2248.1 v1(2507.02,2245.48)
FLASH_CS: U1.25
GPIO0: Q2.3 U1.23 | length 912
  Top Layer w4: U1.23 2458.09,2800.33 2458.09,2777.91 2470,2766 2483,2766 v1(2485,2764) ; v1(2492.04,2730) 2495,2730 2520.39,2704.61 2520.39,2592.25 2509.72,2581.57 2509.72,2458.23 2551.01,2416.93 2568.72,2416.93 v1(2569.5,2416.16) ; v1(2697.94,2456) 2747.3,2456 2818.8,2384.5 2880.96,2322.35 2880.96,2294.59 Q2.3 Q2.3@2850.81,2288
  Bottom Layer w4: v1@2487.68,2761.32 v1(2485,2764) 2485,2749 2489.36,2744.64 2489.36,2732.68 v1(2492.04,2730) ; v1(2569.5,2416.16) 2633.16,2416.16 2673,2456 2696.94,2456 v1@2697.94,2455
GPIO4: FPC1.14 U1.24 | length 152.5
  Top Layer w4: U1.24 2474.27,2796.27 2488.54,2782 2497.28,2782 2556.26,2723.02 2583.32,2723.02 FPC1.14
GPIO5: Q3.1 U1.34 | length 542.8
  Top Layer w4: v1@2482.03,3006.87 U1.34@2500.13,3006.87
  Bottom Layer w4: v1(2482,3006.84) 2562.84,3006.84 2627,3071 2660.62,3071 2667.62,3078 2799,3078 2813,3064 2813,2961 2802.6,2950.6 Q3.1
GPIO9: Q4.1 R10.1 U1.28 | length 1065.5
  Top Layer w4: U1.28 2520.17,2888.79 2526.05,2885.16 ccw(c2534.93,2899.65) 2535.65,2882.67 cw(c2536.69,2855.69) 2536.88,2882.69 2819.7,2881 v1(2822,2878.7) ; v1(2977,2451) 2994.41,2468.41 2994.41,2508.07 3028,2541.65 3028,2724 3012,2740 v1(2992,2740) ; Q4.1 3016.4,2362.93 3001,2378.33 R10.1 3001,2397.5 3023,2419.5 v1(3023,2420)
  Bottom Layer w4: v1(2822,2878.7) 2840.08,2860.62 2840.08,2853.48 2864.51,2829.05 2878.31,2829.05 2890.14,2817.21 2967.36,2740 v1(2992,2740) ; v1(2977,2451) 2977,2435.04 2974,2432.04 2974,2417.96 2983.96,2408 3011,2408 v1(3023,2420)
GPIO12: U1.18
GPIO13: CARD1.3 R5.1 U1.20 | length 413.4
  Top Layer w4: U1.20 2395.53,2785.47 2480,2701 2490.8,2701 2500.39,2691.41 2500.39,2627.39 v1(2470,2597)
  Bottom Layer w4: v1(2470,2597) 2470.5,2597 2490.5,2617 R5.1 2493.76,2614.24 CARD1.3
GPIO14: CARD1.5 R6.1 U1.17 | length 427.4
  Top Layer w4: U1.17 2336.47,2796.27 2342.64,2790.09 2342.64,2786.64 2347.28,2782 2383.14,2782 2474.14,2691 2486.66,2691 2489,2688.66 2489,2655.79 v1(2470.11,2636.9)
  Bottom Layer w4: v1(2470.11,2636.9) 2471.01,2636.9 2489.11,2655 R6.1 2504.96,2655 2550.74,2700.78 CARD1.5
GPIO15: CARD1.2 R8.1 U1.21 | length 435.8
  Top Layer w4: U1.21 2415.21,2781.79 2486,2711 2499.86,2711 2510.39,2700.46 2510.39,2596.39 2490.91,2576.91 2488.08,2576.91 2479.17,2568 v1(2475.77,2568)
  Bottom Layer w4: v1(2475.77,2568) 2478.45,2570.68 2485.68,2570.68 R8.1 2492,2575 2600.95,2575 CARD1.2
GPIO18: FPC1.11 U1.35 | length 591
  Top Layer w4: v1(2466,2836) 2465,2837 2465,3022.72 2467.34,3025.06 2474.18,3025.06 2476.11,3027 2499.74,3027 U1.35 ; v1(2525,2779) 2619,2779 2637,2761 2637,2757.69 2636.64,2738.96 ccw(c2653.63,2738.63) 2636.63,2738.55 2637,2665.66 2637,2662.34 2635.83,2661.17 2634.66,2660 2587.29,2660 FPC1.11
  Bottom Layer w4: v1(2466,2836) 2466,2810 2496,2780 2524,2780 v1(2525,2779)
GPIO19: U1.38
GPIO21: U1.42
GPIO22: U1.39
GPIO23: FPC1.10 U1.36 | length 727.2
  Top Layer w4: v1(2441.02,2831.98) 2441,2848 2455,2862 2455,3026.86 2463.2,3035.06 2470.04,3035.06 2481.24,3046.27 U1.36 ; v1(2532,2807) 2609.31,2807 2653.28,2763.02 2657.96,2758.35 2665.65,2750.65 2677.83,2738.48 2679,2737.31 2679,2663 2656.38,2640.38 FPC1.10
  Bottom Layer w4: v1(2441.02,2831.98) 2441.02,2835.77 2449,2843.75 2449,2844.04 2458.96,2854 2485,2854 2511.57,2827.43 v1(2532,2807)
GPIO25: U1.14
GPIO26: CARD1.7 R4.1 U1.15 | length 455
  Top Layer w4: U1.15 2300.03,2800.92 2300.03,2787.68 2304.96,2782.76 2332.39,2782.76 2346.14,2769 2382,2769 2468.04,2682.96 2468.04,2676.68 v1(2470.72,2674)
  Bottom Layer w4: v1(2470.72,2674) 2470.86,2674 2489.86,2693 2519,2693 2543,2717 2543,2775.96 2555.04,2788 2604,2788 CARD1.7
GPIO27: LED1.4 U1.16 | length 902.1
  Top Layer w4: U1.16 2316.79,2836.79 2334,2854 2391,2854 v1(2404,2841) ; v1(2538.13,2830.2) 2538.13,2831.86 2567.27,2861 2719.67,2861 2728.96,2851.7 2833.18,2851.7 2865.07,2883.59 2865.07,2910.07 2890,2935 3013,2935 3025,2923 3025,2880.53 LED1.4
  Bottom Layer w4: v1(2404,2841) 2426,2841 2449,2864 2504.33,2864 v1(2538.13,2830.2)
GPIO34: U1.10
GPIO35: U1.11
GPIO37: U1.6
GPIO38: U1.7
LEDA: FPC1.6 Q3.3 | length 658.8
  Top Layer w10: FPC1.6 2695.64,2561.64 2763,2629 2763,2832.84 2768.86,2838.7 2844.96,2838.7 2861.33,2855.07 v1(2862.53,2855.07)
  Bottom Layer w4: Q3.3@2854,2981.94 Q3.3
  Bottom Layer w10: Q3.3 2862,2986.06 2862,2855.6 v1(2862.53,2855.07)
NetC7_1: C7.1 U4.20 | length 121.4
  Top Layer w4: v1(2253.57,2538.68) 2256.25,2536 2262.91,2536 2288.66,2536 2291.01,2538.34 U4.20
  Bottom Layer w4: v1(2253.57,2538.68) 2283.68,2538.68 2290.54,2545.54 C7.1
NetC9_1: C9.1 U4.10 | length 65.4
  Top Layer w10: v1(2310.36,2729.5) 2310.53,2729.33 2310.53,2710.8 U4.10
  Bottom Layer w10: C9.1 2291,2723.63 2296.86,2729.49 v1(2310.36,2729.5)
NetD1_1: D1.1 Q4.3 T1.0 | length 1156.2
  Top Layer w10: v1(2867,2388) 2868.53,2386.47 2868.53,2375.29 2979,2264.82 Q4.3
  Bottom Layer w10: D1.1 2406.81,2655.88 2414,2648.69 2414,2561.9 2427.68,2548.23 2427.68,2546.04 2444.91,2528.8 2453.2,2528.8 2472.4,2548 2503.72,2548 2517.72,2562 2535,2562 2553,2544 2553,2493.86 2558.86,2488 2597,2488 ; T1.0 2525,2365 2525,2457 2536,2468 2577,2468 2597,2488 ; v1(2867,2388) 2767,2488 2597,2488
NetL1_1: L1.1 U1.2 | length 233.9
  Top Layer w10: U1.2 2232.05,3026.79 2260.79,3026.79 v1(2261,3027)
  Bottom Layer w10: L1.1@2121,3026.91 2121,3069.14 2126.86,3075 2178,3075 2226,3027 v1(2261,3027)
NetQ1_1: Q1.1 R3.2 | length 65
  Top Layer w4: Q1.1 2682.6,2250.6 2695.22,2263.22 2695.22,2269.23 2696.23,2269.23 R3.2@2699,2272
NetQ2_1: Q2.1 R7.2 | length 94.6
  Top Layer w4: R7.2@2732.79,2309.79 2739.32,2316.32 2752.78,2316.32 2760.87,2324.4 Q2.1@2805.57,2324.4 ; Q2.1@2809.57,2324.4 Q2.1@2815.57,2324.4 ; Q2.1@2809.57,2325.4 2817.26,2325.4 Q2.1@2819.3,2325.4
NetQ3_2: Q3.2 R9.1 | length 107.6
  Bottom Layer w4: R9.1 R9.1@2678,3054 ; Q3.2@2758.35,3029 Q3.2
  Bottom Layer w10: R9.1@2678,3054 2678,3041 2690,3029 Q3.2@2758.35,3029
NetR1_1: R1.1 U2.2 | length 434.9
  Top Layer w4: R1.1 2080.34,2350 2090.34,2360 2355.28,2360 2431,2435.72 U2.2
PSRAM_CS: U1.29 U3.1 | length 317.9
  Top Layer w4: U1.29 2511.24,2911.98 2529.84,2916.89 2536.42,2916.89 2546.54,2927 2754.2,2927 2775.2,2906 U3.1@2804.02,2906
RTS: Q1.2 R7.1 U2.14 | length 377.5
  Top Layer w4: U2.14 2381,2296 2414.18,2329.18 2642.59,2329.18 Q1.2 2676.74,2325.4 2683.79,2318.35 2694.65,2318.35 R7.1@2700,2313
RXD: U1.41 U2.3 | length 1315.6
  Top Layer w4: U2.3 2381,2399.86 2355.14,2374 2163,2374 2100,2437 2100,2502 2104.89,2506.89 2106,2508 2115.64,2518.64 cw(c2131,2507.42) 2119.78,2522.78 2168.02,2571.02 2224,2627 2224,2802.14 2211,2815.14 2211,2820.66 2210.76,2820.91 2210.76,3055.09 2211,3055.34 2211,3082.86 2223.14,3095 2393.18,3095 2395.53,3092.66 U1.41
SCLK: U1.31 U3.6 | length 156.7
  Top Layer w4: U1.31 2519.84,2947.84 2547.47,2975.47 2578.47,2975.47 2585.98,2982.98 U3.6 ; U3.6@2555.68,2996.41 2565.27,3006 U3.6@2585.98,3006
SENSOR_VN: U1.8
SENSOR_VP: U1.5
SIO0: U1.33 U3.5 | length 132.9
  Top Layer w4: U1.33 2525.09,2987.21 2527.43,2989.56 2527.43,3019.43 2553.61,3045.61 2553.61,3047.41 2562.2,3056 U3.5@2585.98,3056
SIO1: U1.27 U3.2 | length 482.6
  Top Layer w4: U1.27 2526.06,2869.1 2526.8,2869.84 2529.54,2871.11 cw(c2536.69,2855.69) 2544.07,2871 2723.81,2871 2733.11,2861.7 2829.04,2861.7 2852.48,2885.14 2852.48,2952.52 2850.13,2954.87 U3.2@2805.15,2954.87
SIO2: U1.32 U3.3 | length 358
  Top Layer w4: U1.32 2519.54,2967.53 2537.43,2985.41 2537.43,3015.29 2553.14,3031 2750.2,3031 2775.2,3006 U3.3@2804.02,3006
SIO3: U1.30 U3.7 | length 97.4
  Top Layer w4: U1.30 2527.16,2928.16 2555,2956 U3.7@2585.98,2956
TXD: R1.2 U1.40 | length 1001.3
  Top Layer w4: R1.2 2080,2413 2088,2421 2088,2505.14 2108.08,2525.22 cw(c2131,2507.42) 2113.2,2530.34 2169.43,2586.58 2212.93,2630.07 2212.93,2681.93 2213,2682 2213,2799 2201,2811 2201,2816.52 2200.76,2816.76 2200.76,3059.24 2201,3059.48 2201,3087 2219,3105 2397.33,3105 2411.7,3090.63 2411.7,3075.67 U1.40
USB2C_N: U2.6 USB1.A7 USB1.B7 | length 1103.7
  Top Layer w4: U2.6 2248.66,2484.09 2251,2481.75 2251,2424.53 2255.24,2420.28 2255.24,2416.97 2249.69,2411.42 2240.69,2411.42 v1(2238.59,2409.31) ; v1(2247.5,2334.58) 2247.5,2332.24 2254.5,2325.24 2254.5,2316.23 2262.7,2308.03 2341.03,2308.03 2391,2358 2547.2,2358 2552.94,2362.02 2588.45,2396.92 ccw(c2569.5,2416.16) 2588.62,2397.09 2821,2629.47 USB1.B7@2903.77,2629.47 ; USB1.B7 2950.16,2629.47 2952.51,2631.81 2952.51,2666.5 2950.16,2668.84 USB1.A7
  Bottom Layer w4: v1(2238.59,2409.31) 2238.59,2393.81 2236.37,2391.6 2236.37,2376.92 2254.5,2358.79 2254.5,2343.93 2247.5,2336.93 v1(2247.5,2334.58)
USB2C_P: U2.5 USB1.A6 USB1.B6 | length 1077.3
  Top Layer w4: v1(2257.36,2394.36) 2258.68,2395.68 2258.68,2406.26 2265.24,2412.83 2265.24,2424.43 2261,2428.67 2261,2481.75 2263.34,2484.09 U2.5 ; v1(2271.5,2334.58) 2271.5,2332.24 2264.5,2325.24 2264.5,2320.37 2266.84,2318.03 2336.88,2318.03 2386.86,2368 2543.06,2368 2581.14,2403.77 ccw(c2569.5,2416.16) 2584,2407.29 2825.88,2649.16 2868,2649.16 2868,2650 2878,2660 ; USB1.A6 2888.84,2649.16 2878,2660 ; USB1.B6 2880.34,2688.53 2878,2686.19 2878,2660
  Bottom Layer w4: v1(2257.36,2394.36) 2253.57,2394.36 2249.01,2389.8 2248.71,2389.8 2246.37,2387.45 2246.37,2381.06 2264.5,2362.93 2264.5,2343.93 2271.5,2336.93 v1(2271.5,2334.58)
VCC3_3V: C1.1 C2.1 C3.1 C4.1 C8.1 C10.1 CARD1.4 FPC1.9 R2.2 R4.2 R5.2 R6.2 R8.2 R9.2 U1.1 U1.3 U1.4 U1.19 U1.37 U1.43 U1.46 U2.4 U2.16 U4.8 U4.13 | length 1574
  Top Layer w10: U1.4 2258.71,2987.21 2265.65,2994.15 2265.65,2996.15 2254.89,3006.9 U1.3 ; U1.1 2232.36,3046.78 2252.5,3046.78 2252.72,3047 2286.42,3047 2296.59,3057.17 ; v1(2245,2713) 2245.22,2712.78 2245.22,2684.97 U4.13 ; 2266.65,2995.15 2284.13,3012.63 2284.13,3013.42 2306.49,3035.78 2307.28,3035.78 2309.69,3038.19 2316.59,3038.19 ; U1.46 2297.61,3071.64 2297.61,3057.17 2316.59,3038.19 ; v1(2314.63,2532.35) 2316.16,2530.82 2316.16,2525.52 2331,2510.68 U2.4 U2.4@2332,2483.09 ; U4.8 2350.53,2711.1 2350.53,2731.53 v1(2351,2732) ; 2356.16,3038.32 U1.43 ; v1(2367,2837) 2375.84,2828.16 U1.19 ; v1(2374,3031) 2323.78,3031 2316.59,3038.19 ; v1(2438,2312.18) 2439.53,2313.71 2445.95,2313.71 2447.24,2315 2481,2281.24 U2.16 ; v1(2439.74,3038.22) 2441.9,3038.22 2451.75,3048.06 2464.65,3048.06 2473.76,3057.17 2473.76,3071.64 U1.37 ; FPC1.9 2666.69,2620.69 2703,2657 v1(2705,2657)
  Bottom Layer w10: R2.2 v1(2297,2838) 2297.5,2837.5 2366.5,2837.5 v1(2367,2837) ; v1(2314.63,2532.35) 2316.16,2533.88 2321.51,2533.88 2322.32,2534.68 2414.32,2534.68 2454,2495 2475.14,2495 2476.14,2494 2481,2494 C3.1 ; C8.1 2340,2717 2340,2721.2 2350.8,2732 v1(2351,2732) ; C2.1 2370,3030 2371,3031 v1(2374,3031) 2396,3009 2426.63,3009 2438.22,3020.6 2438.22,3036.7 v1(2439.74,3038.22) ; v1@2349,2730.2 2349,2729.84 2356,2722.84 C10.1 ; v1(2449.6,2553.49) 2450.3,2554.19 2450.3,2575.3 R8.2 2450,2577 R6.2 R4.2 ; C4.1@2482.5,2520.5 2483,2521 C4.1@2483,2531 ; C3.1@2486.5,2495 2486.5,2514.5 ; CARD1.4 2605.07,2657.26 2704.74,2657.26 v1(2705,2657) ; R9.2 2715.18,3057.18 2748.82,3057.18 v1(2749,3057.36)
VCC_5V: FPC1.3 FPC1.4 LED1.1 Q4.2 R10.2 T5.0 | length 2161.1
  Top Layer w10: FPC1.4 FPC1.3 2636.58,2502.58 2655.95,2521.95 v1(2662,2521.95) ; v1(2748,2513) 2842,2513 2944.9,2410.1 2944.9,2380.9 ; Q4.2 2944.9,2358.36 2944.9,2380.9 ; v1(2972,2353) 2972,2370 2961.1,2380.9 2944.9,2380.9 ; LED1.1 3018.05,2997.92 3041,2974.98 3041,2915.4 3052.89,2903.51 3052.89,2480.89 3025.71,2453.71 2998.53,2426.53 2990.53,2426.53 R10.2 2944.9,2380.9
  Bottom Layer w10: T5.0 2189,2364.8 2254.17,2299.63 2422.27,2299.63 2429.72,2292.18 2481.33,2292.18 2508.03,2265.48 2510.89,2265.48 2511.37,2265 2886.14,2265 2911,2289.86 2911,2303.56 2958.91,2351.47 2970.47,2351.47 v1(2972,2353) ; v1(2662,2521.95) 2662.95,2521 2739.98,2521 v1(2748,2513)
VDD_SDIO: C6.1 U1.26 U3.8 | length 176.9
  Top Layer w10: U1.26 2507.85,2849.42 2516.13,2849.42 v1(2536.69,2855.69) ; v1(2534.93,2899.65) 2541.74,2902.58 2583.57,2902.59 U3.8
  Bottom Layer w10: v1(2534.93,2899.65) v1@2535.81,2898.78 ; v1(2536.69,2855.69) 2535.81,2856.56 v1@2535.81,2898.78 ; C6.1 2550,2913 v1@2535.79,2898.79
pads on no net: CARD1. CARD1.1 CARD1.8 FPC1.15 L1. L1.2 LED1.2 U1.44 U1.45 U1.47 U1.48 U2.7 U2.8 U2.9 U2.10 U2.11 U2.12 U2.15 U3.9 U4.2 U4.3 U4.4 U4.5 U4.6 U4.7 U4.12 U4.14 U4.15 U4.16 U4.17 U4.19 U4.21 U4.22 U4.25 USB1. USB1.A5 USB1.A8 USB1.B5 USB1.B8
copper on no net:
  other v1: 2952,2221
  other v2: 2675.32,2960.32 2714.69,2960.32 2675.32,2999.69 2714.69,2999.69

## Polygon pours and split planes (outlines as drawn)
CS on Bottom Layer "CS_L04_P000" (solid, remove dead copper, pour order 0): 2181,2748 2181,3110 2192,3121 3021,3121 3027,3115 3037,3115 3070,3082 3070,3078 3076,3072 3076,3063 3080,3059 3080,2881 3085,2876 3085,2873 3095,2863 3101,2863 3102,2862 3129,2862 3134,2857 3140,2857 3160,2837 3160,2834 3167,2827 3167,2498 3165,2496 3165,2489 3164,2488 3164,2482 3155,2473 3155,2472 3141,2458 3135,2458 3128,2451 3096,2451 3081,2436 3081,2394 3079,2392 3079,2251 3074,2246 3074,2233 3058,2217 3056,2217 3046,2207 3043,2207 3035,2199 3026,2199 3021,2194 2106,2194 2102,2198 2093,2198 2090,2201 2085,2201 2078,2208 2076,2208 2067,2217 2067,2220 2059,2228 2059,2233 2052,2240 2052,2246 2045,2253 2045,2747 2044,2748
CS on Top Layer "CS_L01_P001" (solid, remove dead copper, pour order 1): 2183.24,2750.75 2183.24,3112.75 2194.24,3123.75 3023.24,3123.75 3029.24,3117.75 3039.24,3117.75 3072.24,3084.75 3072.24,3080.75 3078.24,3074.75 3078.24,3065.75 3082.24,3061.75 3082.24,2883.75 3087.24,2878.75 3087.24,2875.75 3097.24,2865.75 3103.24,2865.75 3104.24,2864.75 3131.24,2864.75 3136.24,2859.75 3142.24,2859.75 3162.24,2839.75 3162.24,2836.75 3169.24,2829.75 3169.24,2500.75 3167.24,2498.75 3167.24,2491.75 3166.24,2490.75 3166.24,2484.75 3157.24,2475.75 3157.24,2474.75 3143.24,2460.75 3137.24,2460.75 3130.24,2453.75 3098.24,2453.75 3083.24,2438.75 3083.24,2396.75 3081.24,2394.75 3081.24,2253.75 3076.24,2248.75 3076.24,2235.75 3060.24,2219.75 3058.24,2219.75 3048.24,2209.75 3045.24,2209.75 3037.24,2201.75 3028.24,2201.75 3023.24,2196.75 2108.24,2196.75 2104.24,2200.75 2095.24,2200.75 2092.24,2203.75 2087.24,2203.75 2080.24,2210.75 2078.24,2210.75 2069.24,2219.75 2069.24,2222.75 2061.24,2230.75 2061.24,2235.75 2054.24,2242.75 2054.24,2248.75 2047.24,2255.75 2047.24,2749.75 2046.24,2750.75
CS on GND02 (split plane): 3009.17,3100.98 3015.8,3099.86 3022.27,3097.99 3028.49,3095.42 3034.37,3092.17 3039.86,3088.27 3044.88,3083.79 3049.36,3078.77 3053.25,3073.29 3056.51,3067.4 3059.08,3061.18 3060.94,3054.72 3062.07,3048.08 3062.42,3041.96 3062.36,3041.37 3062.36,2893.87 3062.38,2893.6 3062.7,2887.93 3063.69,2882.11 3065.33,2876.44 3067.58,2870.98 3070.44,2865.82 3073.85,2861 3077.79,2856.6 3082.19,2852.67 3087,2849.25 3092.17,2846.4 3097.62,2844.14 3103.29,2842.51 3109.11,2841.52 3114.93,2841.19 3114.93,2841.18 3114.95,2841.17 3115.17,2841.19 3115.38,2841.18 3119.92,2841.27 3120.21,2841.31 3124.27,2840.99 3128.86,2839.89 3133.23,2838.08 3137.25,2835.61 3140.84,2832.55 3143.91,2828.95 3146.38,2824.93 3148.18,2820.57 3149.29,2815.97 3149.61,2811.81 3149.57,2811.35 3149.36,2506.29 3149.36,2506.28 3149.36,2506.21 3149.37,2506.21 3149.42,2505.71 3149.08,2501.45 3147.99,2496.92 3146.21,2492.61 3143.77,2488.63 3140.74,2485.08 3137.19,2482.05 3133.21,2479.61 3128.9,2477.83 3124.37,2476.74 3120.32,2476.42 3119.89,2476.46 3115.45,2476.46 3115.13,2476.43 3109.56,2476.12 3103.73,2475.13 3098.06,2473.49 3092.6,2471.23 3087.43,2468.37 3082.61,2464.96 3078.21,2461.02 3074.27,2456.62 3070.85,2451.8 3067.99,2446.63 3065.73,2441.17 3064.1,2435.49 3063.11,2429.67 3062.8,2424.2 3062.76,2423.83 3062.36,2276.42 3062.36,2276.39 3062.36,2276.37 3062.42,2275.8 3062.07,2269.65 3060.94,2263.02 3059.08,2256.55 3056.51,2250.34 3053.25,2244.45 3049.36,2238.96 3044.88,2233.94 3039.86,2229.46 3034.37,2225.57 3028.49,2222.31 3022.27,2219.74 3015.8,2217.88 3009.17,2216.75 3003.04,2216.41 3002.45,2216.46 2127.45,2216.46 2126.86,2216.41 2120.74,2216.75 2114.1,2217.88 2107.64,2219.74 2101.42,2222.31 2095.54,2225.57 2090.05,2229.46 2085.03,2233.94 2080.55,2238.96 2076.66,2244.45 2073.4,2250.34 2070.83,2256.55 2068.96,2263.02 2067.84,2269.65 2067.49,2275.78 2067.55,2276.37 2067.44,2743 2184,2743 2184,3101.27 3002.45,3101.27 3003.04,3101.33
VCC3_3V on PWR03 (split plane): 3009.17,3100.98 3015.8,3099.86 3022.27,3097.99 3028.49,3095.42 3034.37,3092.17 3039.86,3088.27 3044.88,3083.79 3049.36,3078.77 3053.25,3073.29 3056.51,3067.4 3059.08,3061.18 3060.94,3054.72 3062.07,3048.08 3062.42,3041.96 3062.36,3041.37 3062.36,2893.87 3062.38,2893.6 3062.7,2887.93 3063.69,2882.11 3065.33,2876.44 3067.58,2870.98 3070.44,2865.82 3073.85,2861 3077.79,2856.6 3082.19,2852.67 3087,2849.25 3092.17,2846.4 3097.62,2844.14 3103.29,2842.51 3109.11,2841.52 3114.93,2841.19 3114.93,2841.18 3114.95,2841.17 3115.17,2841.19 3115.38,2841.18 3119.92,2841.27 3120.21,2841.31 3124.27,2840.99 3128.86,2839.89 3133.23,2838.08 3137.25,2835.61 3140.84,2832.55 3143.91,2828.95 3146.38,2824.93 3148.18,2820.57 3149.29,2815.97 3149.61,2811.81 3149.57,2811.35 3149.36,2506.29 3149.36,2506.28 3149.36,2506.21 3149.37,2506.21 3149.42,2505.71 3149.08,2501.45 3147.99,2496.92 3146.21,2492.61 3143.77,2488.63 3140.74,2485.08 3137.19,2482.05 3133.21,2479.61 3128.9,2477.83 3124.37,2476.74 3120.32,2476.42 3119.89,2476.46 3115.45,2476.46 3115.13,2476.43 3109.56,2476.12 3103.73,2475.13 3098.06,2473.49 3092.6,2471.23 3087.43,2468.37 3082.61,2464.96 3078.21,2461.02 3074.27,2456.62 3070.85,2451.8 3067.99,2446.63 3065.73,2441.17 3064.1,2435.49 3063.11,2429.67 3062.8,2424.2 3062.76,2423.83 3062.36,2276.42 3062.36,2276.39 3062.36,2276.37 3062.42,2275.8 3062.07,2269.65 3060.94,2263.02 3059.08,2256.55 3056.51,2250.34 3053.25,2244.45 3049.36,2238.96 3044.88,2233.94 3039.86,2229.46 3034.37,2225.57 3028.49,2222.31 3022.27,2219.74 3015.8,2217.88 3009.17,2216.75 3003.04,2216.41 3002.45,2216.46 2127.45,2216.46 2126.86,2216.41 2120.74,2216.75 2114.1,2217.88 2107.64,2219.74 2101.42,2222.31 2095.54,2225.57 2090.05,2229.46 2085.03,2233.94 2080.55,2238.96 2076.66,2244.45 2073.4,2250.34 2070.83,2256.55 2068.96,2263.02 2067.84,2269.65 2067.49,2275.78 2067.55,2276.37 2067.44,2751 2183,2751 2183,3101.27 3002.45,3101.27 3003.04,3101.33

## Keep-outs
Keep-Out Layer:
  the board outline again, w10

## Other copper
GND02 (plane layer: these items are gaps in the copper):
  rectangle: 2044,2743 2184,3127
  lines w12: 2091,3123 2181,3123 2188,3116
PWR03 (plane layer: these items are gaps in the copper):
  rectangle: 2044,2751 2183,3126
  lines w12: 2047,2752 2052,2747 ; 2186,3121 2188,3119

## Silkscreen, mask and mechanical layers (free items; w line width, h text height)
Mechanical 1:
  lines w10: 3119.5,2861.29 3114.93,2861.29 cw(c3114.84,2893.68) 3082.45,2893.85 3082.45,3041.32 ccw(c3002.24,3041.34) 3002.22,3121.55 2383.74,3121.37 2357.45,3121.37 2126.19,3121.37 ccw(c2126.19,3042.63) 2047.45,3042.63 2047.45,2791.17 2047.45,2521.37 2047.45,2275.11 ccw(c2126.19,2275.11) 2126.19,2196.37 3002.45,2196.37 ccw(c3002.47,2276.34) 3082.45,2276.37 3082.84,2423.77 cw(c3115.44,2423.77) 3115.44,2456.37 3119.89,2456.37 ccw(c3119.89,2506.28) 3169.81,2506.28 3169.45,2811.33 ; 3119.5,2861.5 cw(c3119.5,2811.33) 3169.66,2811.33